# Altium PCB R2D.PcbDoc
Units mm, origin at the board's own origin, x right, y up, seen from the top; angles counter-clockwise.
Board outline 29.5 x 30 mm, 2 copper layers (Top Layer, Bottom Layer); 13 components, 10 nets, 43 pads, 9 vias.
Unrouted connection lines stored in the file: 1.
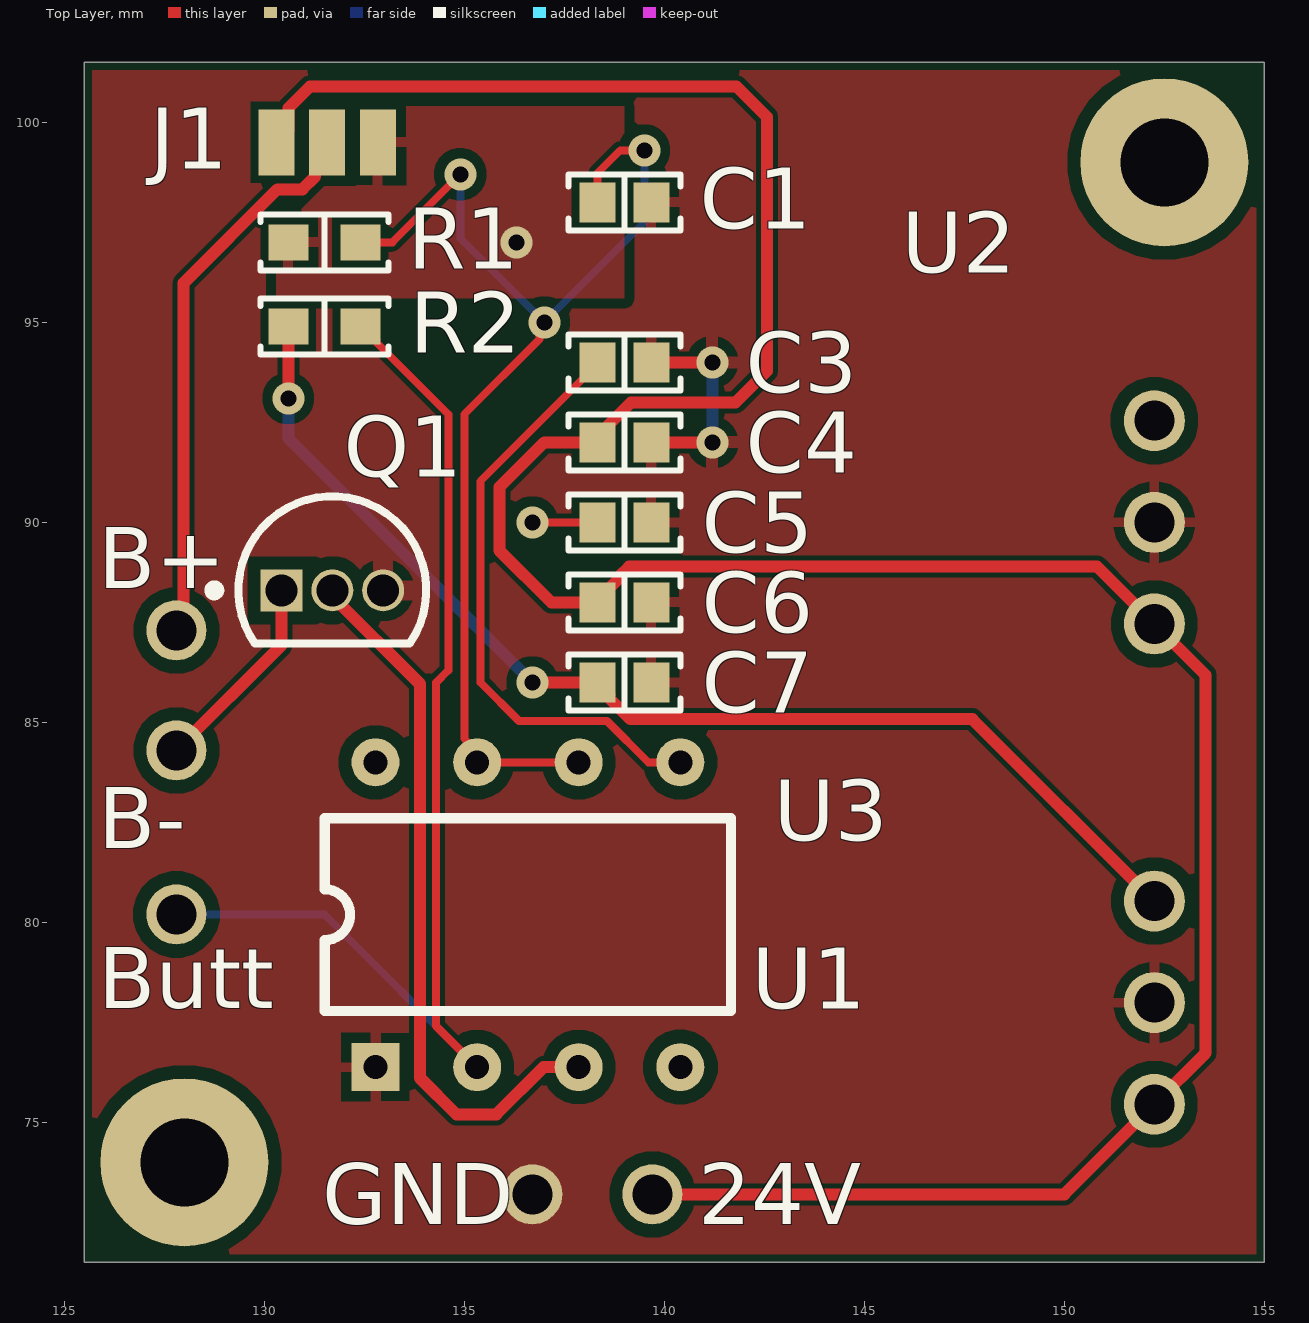
[diagram p0: Top Layer view]
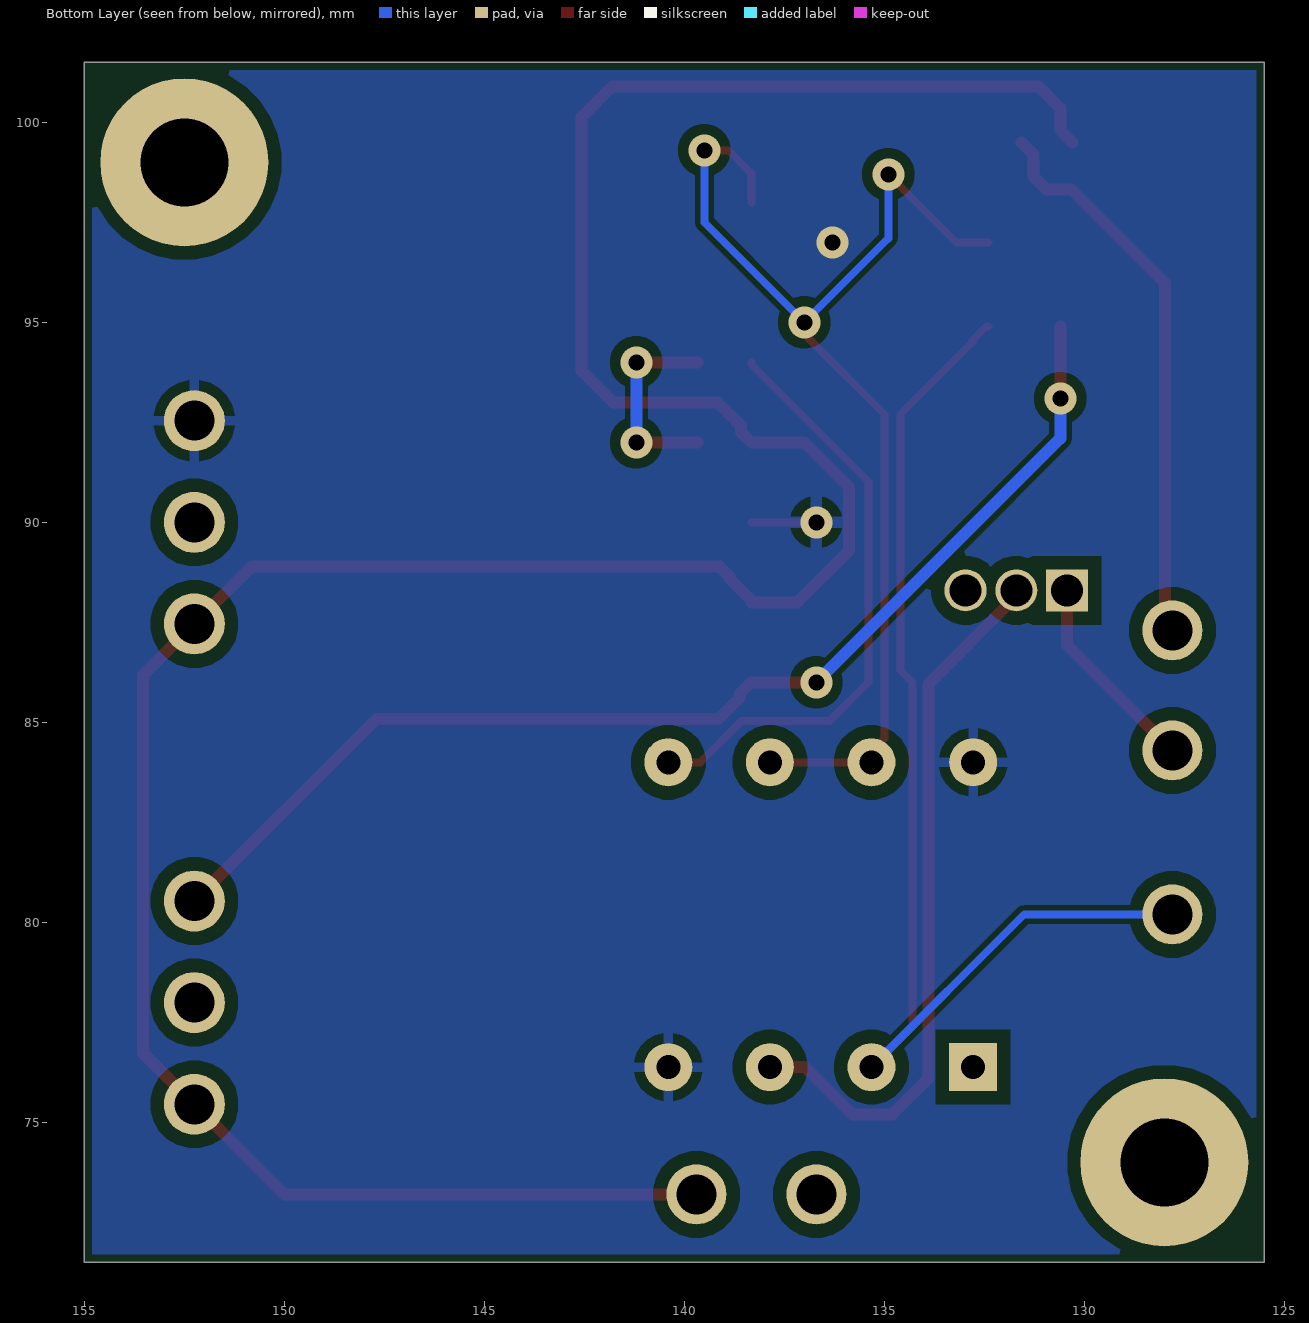
[diagram p1: Bottom Layer view, seen from below]
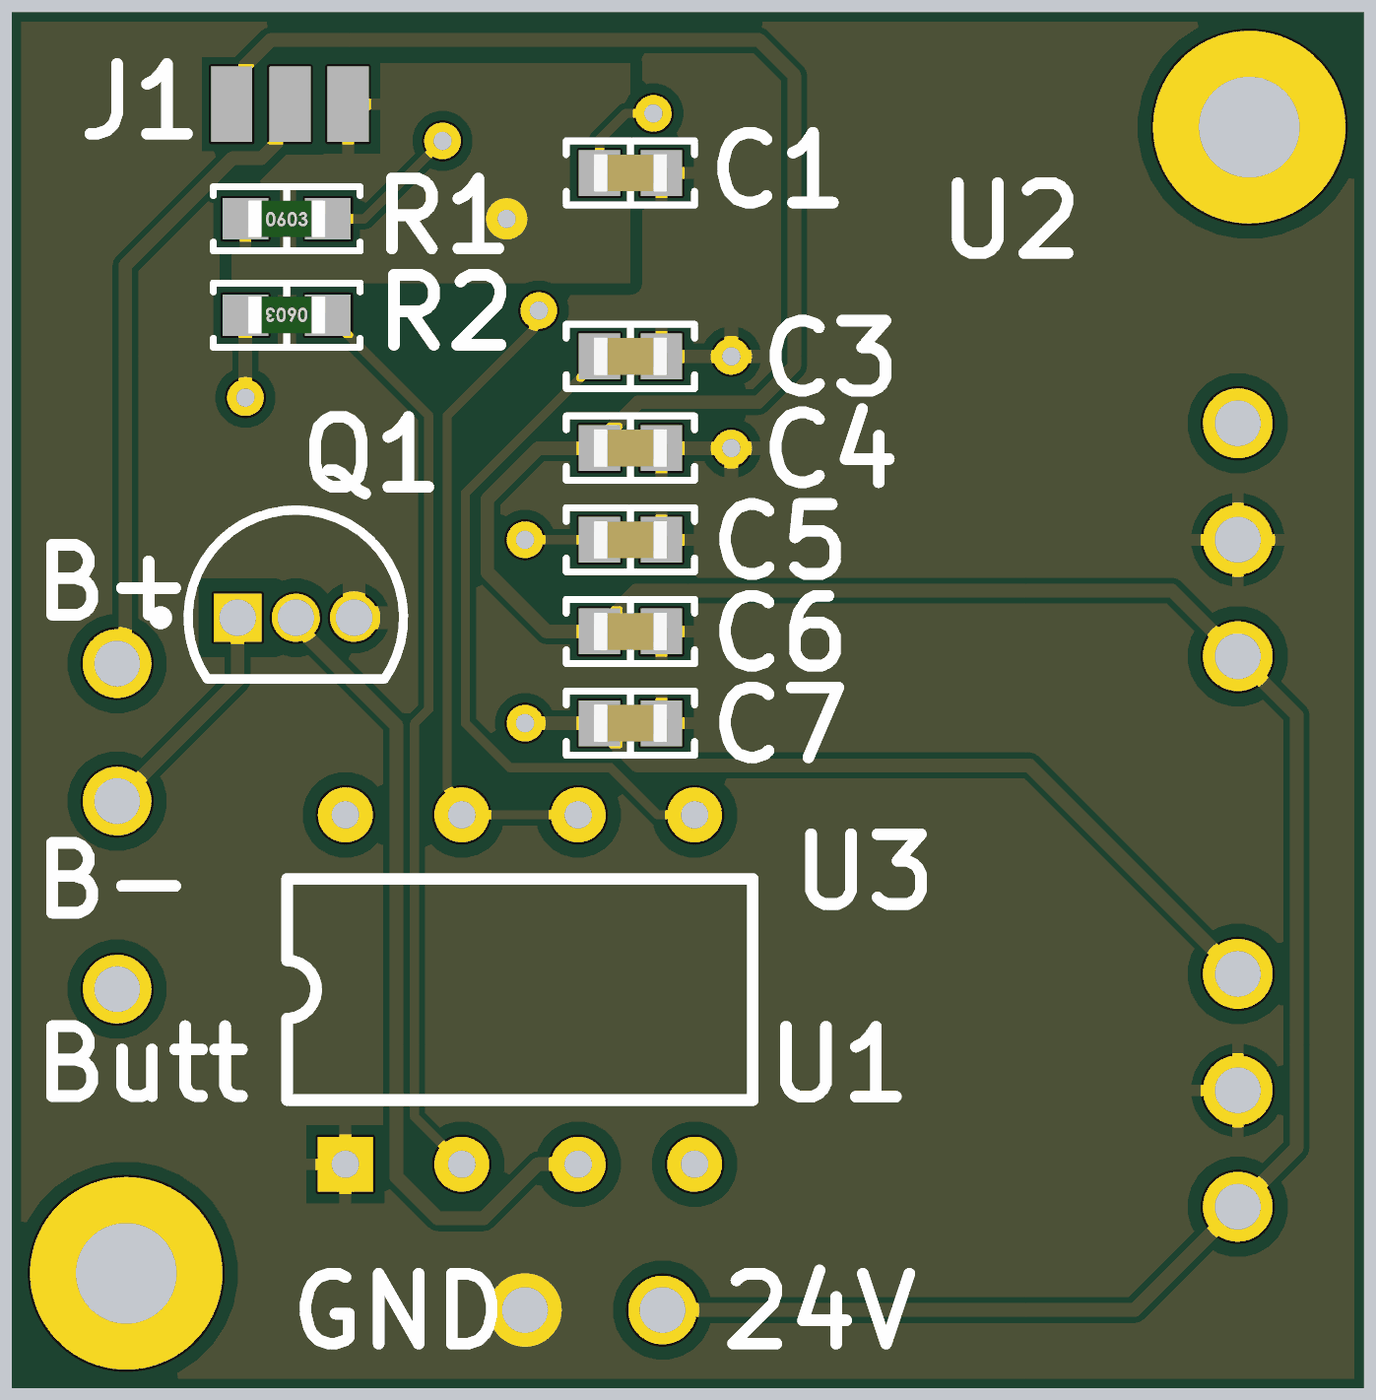
[diagram p2: 3D render of the assembled board from above, using the file's embedded part models]

## Layer stack, top to bottom
Top Solder: solder mask 0.0102, Solder Resist, Dk 3.5
Top Layer: signal copper 0.0356
Dielectric 1: dielectric 0.32, FR-4, Dk 4.8
Bottom Layer: signal copper 0.0356
Bottom Solder: solder mask 0.0102, Solder Resist, Dk 3.5

## Board outline
125.5,71.5 155,71.5 155,101.5 125.5,101.5

## Design rules (kind name [scope] priority, off if disabled: settings)
BoardOutlineClearance [All] p1: gap=0.2 ignorepadtopadclearanceinfootprint=FALSE // Trace to V-cut >0.4mm
Clearance [All] p1: gap=0.254 ignorepadtopadclearanceinfootprint=TRUE except(0: Arc-Hole Track-Hole SMDPad-Hole THPad-Hole Via-Hole Fill-Hole Poly-Hole Region-Hole Text-Hole; 0.127: Arc-Arc Arc-Track Arc-Fill Arc-Poly Arc-Region Track-Track Track-Fill Track-Poly Track-Region SMDPad-SMDPad; 0.15: Arc-Text Track-Text SMDPad-Text THPad-Text Via-Text Fill-Text Poly-Text Region-Text Text-Text; 0.2: Arc-SMDPad Track-SMDPad SMDPad-Fill SMDPad-Poly SMDPad-Region; 0.33: Arc-THPad Track-THPad THPad-Fill THPad-Poly THPad-Region; 0.5: SMDPad-THPad THPad-THPad THPad-Via)
DiffPairsRouting [All] p1: maxlimit=10 minlimit=0.254 mostfreqgap=0.254 toplayer_minwidth=0.127 toplayer_maxwidth=5 toplayer_prefwidth=0.254 bottomlayer_minwidth=0.127 bottomlayer_maxwidth=5 bottomlayer_prefwidth=0.254 maxuncoupledlength=12.7
HoleSize [All] p1: absolutevalues=TRUE maxlimit=6.3 minlimit=0.2 maxpercent=80.000 minpercent=20.000 // Finished hole size tolerance +0.13/-0.08mm
HoleToHoleClearance [All] p1: gap=0.5 allowstackedmicrovias=TRUE
MinimumAnnularRing [All] p1: minimumring=0.13 // 1oz Copper
PolygonConnect [All] p1: connectstyle=Relief reliefconductorwidth=0.254 reliefentries=4 polygonreliefangle="90 Angle" airgapwidth=0.254
RoutingVias [All] p1: holewidth=0.711 width=1.27 viastyle="Through Hole" minholewidth=0.3 minwidth=0.6 maxholewidth=0.711 maxwidth=1.27
SolderMaskExpansion [All] p1: expansion=0.05 istentingtop=FALSE
Width [All] p1: maxlimit=4.5 minlimit=0.127 preferedwidth=0.254 minimp=50.000000 maximp=50.000000 favimp=50.000000
27 further rules are at their usual default settings.

## Components (designator, comment, footprint, x,y, rotation, side; value= is the part's Value field where it differs from the comment)
C1 "SMD Capacitor" "CAP 0603/1608" 139,98 r0 top value=1uF
C3 "SMD Capacitor" "CAP 0603/1608" 139,94 r0 top value=1uF
C4 "SMD Capacitor" "CAP 0603/1608" 139,92 r0 top value=10uF
C5 "SMD Capacitor" "CAP 0603/1608" 139,90 r0 top value=10uF
C6 "SMD Capacitor" "CAP 0603/1608" 139,88 r0 top value=10uF
C7 "SMD Capacitor" "CAP 0603/1608" 139,86 r0 top value=10uF
J1 "JUMPERID" SMD-JUMPER-3 131.57,99.5 r180 top net-tie
Q1 "BC547C" ONSC-TO-92-3-29-11 131.7,88.3 r0 top
R1 "SMD Resistor" "STACKPOLE CSR0603" 131.5,97 r0 top value=2M
R2 "SMD Resistor" "STACKPOLE CSR0603" 131.5,94.9 r180 top value=1k
U1 "NE555P" NE555P 132.78,76.38 r90 top
U2 "R-78E12-1.0" SIP3_RECOM 150,90 r90 top
U3 "R-78E05-1.0" SIP3_RECOM 150,77.992 r90 top

## Footprints (in the part's own frame and the unit in brackets; to place one, negate y for a bottom-side part, rotate by r counter-clockwise, add the part's x,y. Pads: shape width x height; smd on the part's side, far side on the other; paste and mask are expansions set on the pad)
"CAP 0603/1608" [mm] "Chip Capacitor, 2-Leads, Body 1.60x0.80mm, IPC Medium Density"
  rect 0.9x1 smd: 1(-0.675,0) 2(0.675,0)
  silkscreen extent -1.4,-0.7 1.4,0.7, body extent -0.8,-0.41 0.8,0.41, height 0.82
NE555P [mm]
  rect 1.2x1.2 hole 0.6: 1(0,0)
  round 1.2 hole 0.6: 2(0,-2.54) 3(0,-5.08) 4(0,-7.62) 5(7.62,-7.62) 6(7.62,-5.08) 7(7.62,-2.54) 8(7.62,0)
  silkscreen extent 1.4,-8.89 6.22,1.27
ONSC-TO-92-3-29-11 [mm] "TO, 3-Leads, Body Dia 4.7mm, Pitch 1.27mm"
  rect 1.05x1.05 hole 0.8: 1(-1.27,0)
  round 1.05 hole 0.8: 2(0,0) 3(1.27,0)
  silkscreen extent -3.07,-1.34 2.35,2.35, body extent -2.35,-1.33 2.36,2.36, height 7.87
SIP3_RECOM [mm]
  round 1.524 hole 1: 1(-2.54,-2.25) 2(0,-2.25) 3(2.54,-2.25)
  body extent -5.75,-4.25 5.75,4.25, height 10.4
SMD-JUMPER-3 [mm] "Jumper, SMD"
  rect 0.9x1.65 smd: 1(-1.27,0) 2(0,0) 3(1.27,0)
"STACKPOLE CSR0603" [mm] "Chip Resistor, 2-Leads, Body 1.60x0.80mm, IPC Medium Density"
  rect 1x0.9 smd: 1(-0.9,0) 2(0.9,0)
  silkscreen extent -1.6,-0.7 1.6,0.7, body extent -0.85,-0.4 0.85,0.4, height 0.45

## Part data
C1 C3 C4 C5 C6 C7: "Capacitor with multiple Footprints"
J1: library part "SMD Jumper 3"
Q1: library part CMP-1048-01437-1, "Amplifier Transistor, NPN Silicon, 3-Pin TO-92, Bulk Box", Manufacturer="On Semiconductor", ComponentLink1Description="Manufacturer URL", ComponentLink1URL=http://www.onsemi.com/, ComponentLink2Description=Datasheet, ComponentLink2URL=http://www.onsemi.com/pub_link/Collateral/BC546-D.PDF, ComponentLink3Description="Package Specification", ComponentLink3URL=http://www.onsemi.cn/pub_link/Collateral/2N6426-D.PDF, DatasheetVersion="Rev. 7", fT Min (MHz)=150, IC Continuous (A)=0.1, Mounting Technology="Through Hole", PackageDescription="3-Pin Transistor Outline, Body 4.825 x 3.685 mm, Pitch 1.27 mm", PackageReference=TO-92-3-29-11_AM_SL, PackageVersion="Rev. AM", Packing="Bulk Box", PartNumber=BC547C, Polarity=NPN, RoHS=FALSE
R1 R2: "Resistor with multiple footprints"
U1: "Zeitgeber"
U2: library part R-78E05-1.0, "Nonisolated 5V Switchmode converter"
U3: "Nonisolated 5V Switchmode converter"

## Free pads (board coordinates)
  round 1.5 hole 1: 23(139.7,73.2) 24(136.7,73.2) 25(127.8,84.3) 26(127.8,87.3) 29(127.8,80.2)
  round 4.2 hole 2.2: 27(128,74) 28(152.5,99)

## Via types
v1: diameter 0.8, hole 0.4, Top Layer to Bottom Layer, 9 vias

## Nets (pads, with @x,y where several pads share a name; then routed paths per layer and width w, separated by ;. In a path a pad name is that pad's centre, name@x,y a point inside that pad or via, vN(x,y) a via of type N, cw(c..) or ccw(c..) an arc to the next point about the centre after c; other vN are vias at no path point)
5V: C7.1 R2.2 U3.3 | length 29.3
  Top Layer w0.3: v1(130.6,93.1) R2.2 ; v1(136.7,86) C7.1 138.625,85.7 138.625,85.605 139.15,85.08 147.702,85.08 U3.3
  Bottom Layer w0.3: v1(130.6,93.1) 130.6,92.1 v1(136.7,86)
12V: C5.1 J1.1 R1.1 U1.4 U1.8 U2.3 | length 1.6
  Top Layer w0.2: v1(136.7,90) C5.1
  other v1: 136.3,97
24V: C4.1 C6.1 J1.3 pad.23 U2.1 U3.1 | length 73.9
  Top Layer w0.3: J1.3 130.6,99.8 130.6,100.353 131.147,100.9 141.8,100.9 142.571,100.129 142.571,93.787 141.784,93 139.173,93 138.585,92.412 138.585,92.26 C4.1 137,92 135.877,90.877 135.877,89.296 137.173,88 C6.1 138.325,88.05 138.875,88.6 138.875,88.645 139.121,88.891 150.82,88.891 U2.1 153.532,86.178 153.532,76.734 U3.1 149.998,73.2 pad.23
Button: pad.29 R2.1 U1.2 | length 29.1
  Top Layer w0.2: R2.1 132.45,94.9 132.8,94.55 132.8,94.5 134.6,92.7 134.6,86.3 134.29,85.99 134.29,77.41 U1.2
  Bottom Layer w0.2: pad.29 131.5,80.2 U1.2
Buzzer+: J1.2 pad.26 | length 14.1
  Top Layer w0.3: pad.26 127.98,87.48 127.98,95.98 130.325,98.325 130.95,98.325 131.27,98.645 131.27,99.2 J1.2
Buzzer-: pad.25 Q1.1 | length 5.1
  Top Layer w0.3: pad.25 130.43,86.93 Q1.1
GND: C1.2 C3.2 C4.2 C5.2 C6.2 C7.2 pad.24 Q1.3 U1.1 U2.2 U3.2 | length 5.1
  Top Layer w0.3: C4.2 v1(141.2,92) ; C3.2 v1(141.2,94)
  Bottom Layer w0.3: v1(141.2,92) v1(141.2,94)
NetC1_1: C1.1 R1.2 U1.6 U1.7 | length 29.7
  Top Layer w0.2: R1.2 133.2,97 v1(134.9,98.7) ; v1(137,95) 136.885,94.885 136.885,94.585 135,92.7 135,84.591 135.32,84.271 U1.7 U1.6 ; C1.1 138.325,98.725 138.9,99.3 v1(139.5,99.3)
  Bottom Layer w0.2: v1(134.9,98.7) 134.9,97.1 v1(137,95) 139.5,97.5 v1(139.5,99.3)
NetC3_1: C3.1 U1.5 | length 15
  Top Layer w0.2: C3.1 138.325,93.95 135.4,91.025 135.4,86 136.37,85.03 138.57,85.03 139.6,84 U1.5
OUT: Q1.2 U1.3 | length 17.9
  Top Layer w0.3: Q1.2 131.7,88.149 133.891,85.958 133.891,76.109 134.8,75.2 135.8,75.2 136.98,76.38 U1.3

## Polygon pours and split planes (outlines as drawn)
12V on Top Layer "12V_L01_P000" (solid, remove dead copper, pour order 0): 130.3,95.6 139,95.6 139,100.4 132.3,100.4 132.3,98.4 131.498,98.4 130.3,97.202
GND on Top Layer "GND_L01_P002" (solid, remove dead copper, pour order 2): 125.5,101.5 155,101.5 155,71.5 125.5,71.5
12V on Bottom Layer "12V_L02_P001" (solid, remove dead copper, pour order 1): 125.5,101.5 155,101.5 155,71.5 125.5,71.5

## Silkscreen, mask and mechanical layers (free items; w line width, h text height)
Top Overlay:
  text "B+" at 125.854,88.354 h1.52
  text "B-" at 125.854,81.854 h1.52
  text "Butt" at 125.854,77.854 h1.52
  text "GND" at 131.454,72.454 h1.52
  text "24V" at 140.854,72.454 h1.52
Boardoutline:
  the board outline again, w0.2